# Altium PCB PCB1.PcbDoc
Units mil, origin at the board's own origin, x right, y up, seen from the top; angles counter-clockwise.
Board outline 6000 x 4000 mil, 2 copper layers (Top Layer, Bottom Layer); 104 components, 78 nets, 342 pads, 68 vias.
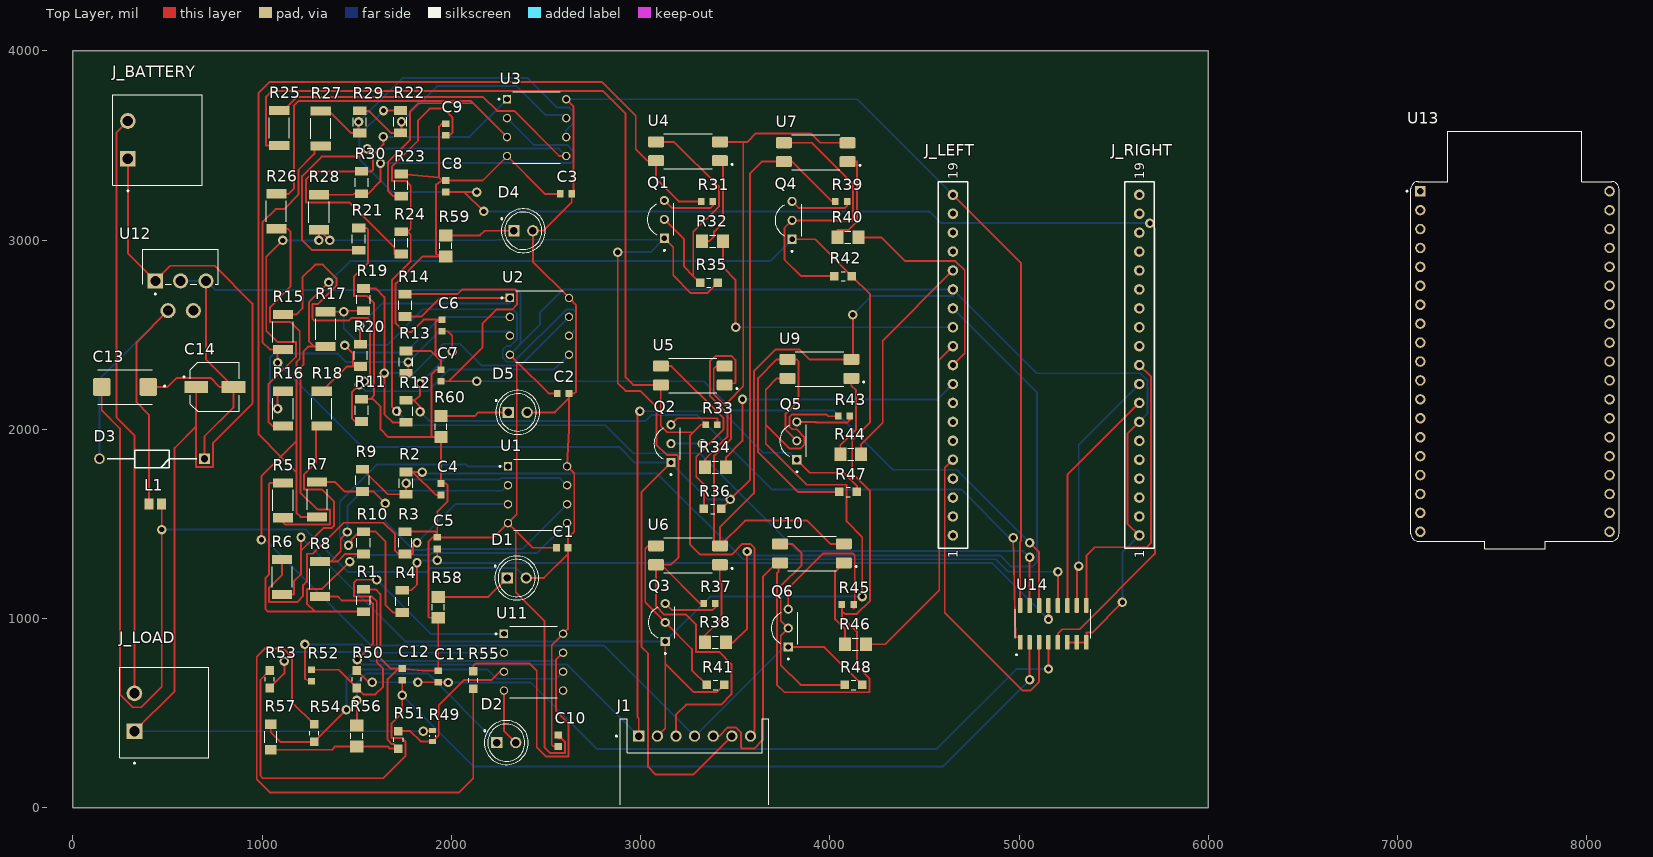
[diagram p0: Top Layer view]
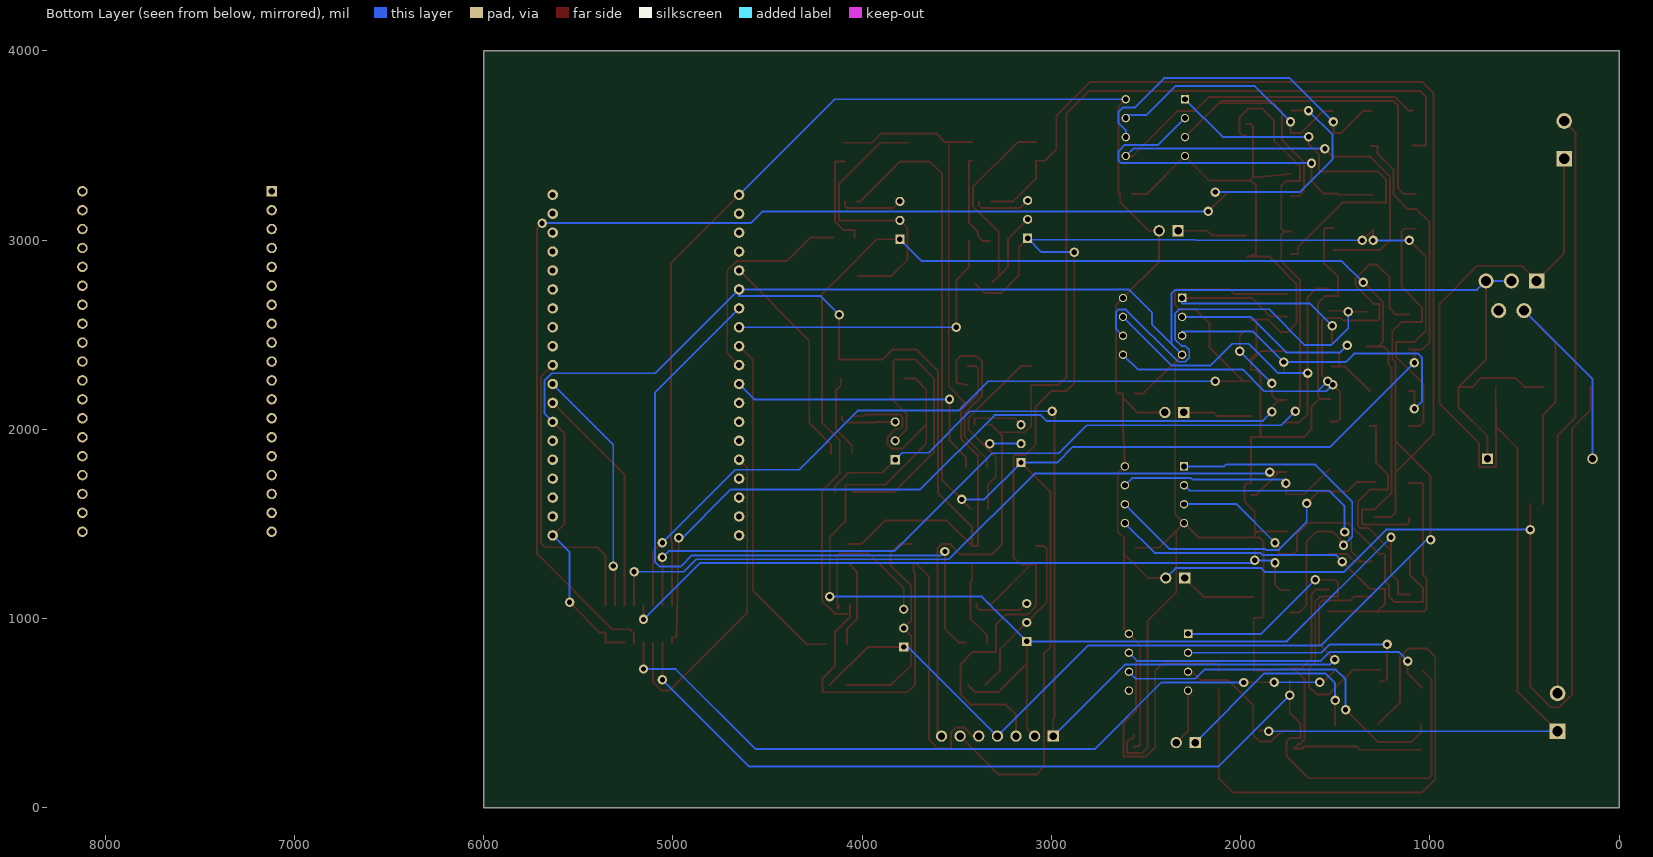
[diagram p1: Bottom Layer view, seen from below]
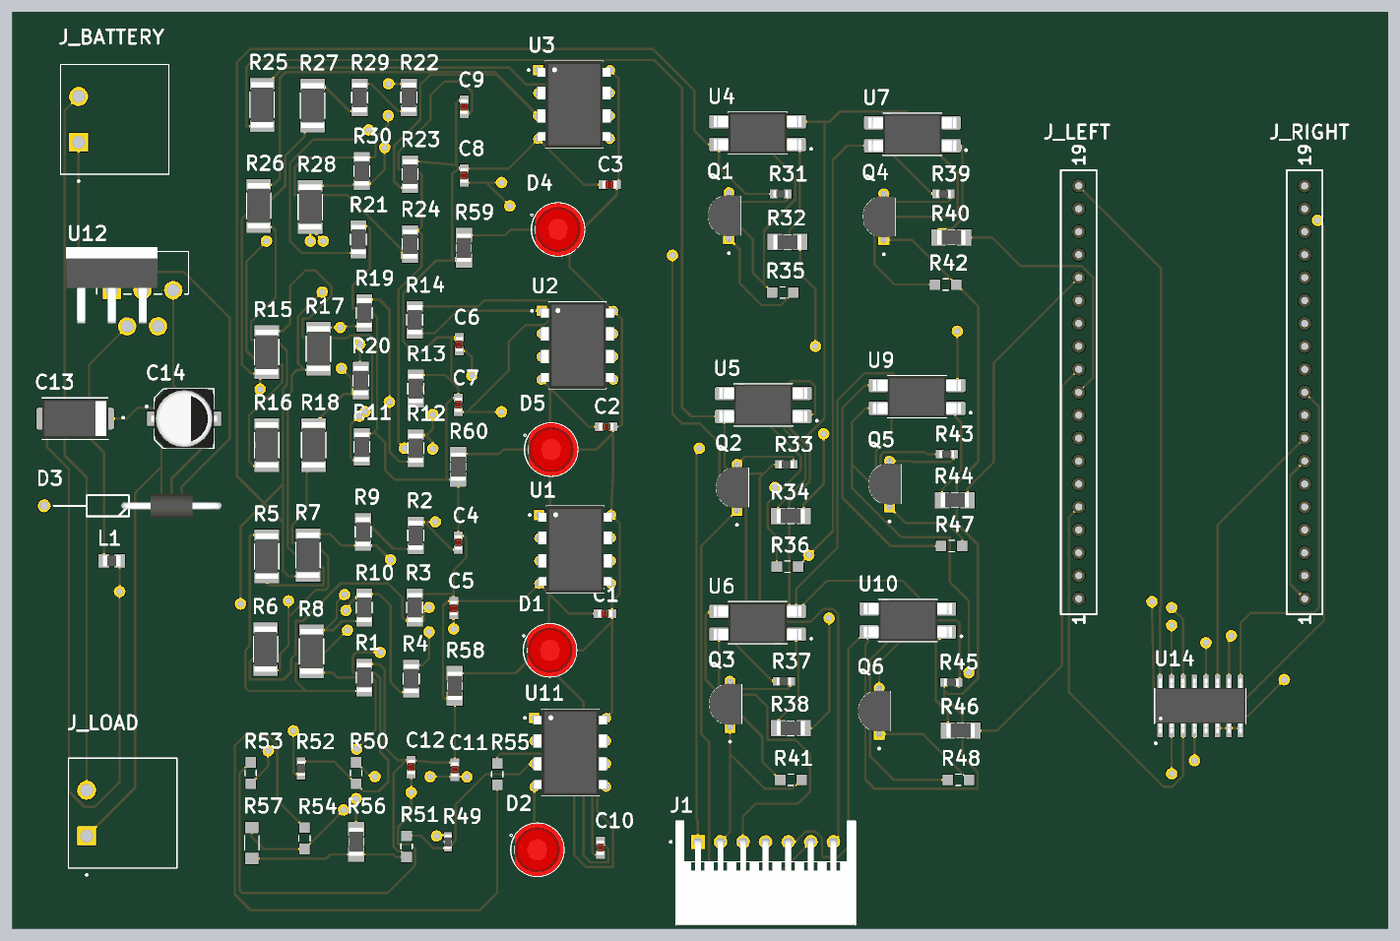
[diagram p2: 3D render of the assembled board from above, using the file's embedded part models]

## Layer stack, top to bottom
Top Solder: solder mask 0.4, Solder Resist, Dk 3.5
Top Layer: signal copper 1.4
Dielectric 1: dielectric 12.6, FR-4, Dk 4.8
Bottom Layer: signal copper 1.4
Bottom Solder: solder mask 0.4, Solder Resist, Dk 3.5

## Board outline
0,0 6000,0 6000,4000 0,4000

## Design rules (kind name [scope] priority, off if disabled: settings)
Clearance [All] p1: gap=10 ignorepadtopadclearanceinfootprint=FALSE
PolygonConnect [All] p1: connectstyle=Relief reliefconductorwidth=10 reliefentries=4 polygonreliefangle="90 Angle" airgapwidth=10
RoutingVias [All] p1: holewidth=28 width=50 viastyle="Through Hole" minholewidth=28 minwidth=50 maxholewidth=28 maxwidth=50
SolderMaskExpansion [All] p1: expansion=4 istentingtop=FALSE
SupplyNets "Schematic Supply Nets_1" [InNet('8')] p1: voltage=0.000
SupplyNets "Schematic Supply Nets" [InNet('4')] p2: voltage=0.000
Width [All] p1: maxlimit=10 minlimit=10 preferedwidth=10
30 further rules are at their usual default settings.

## Classes and differential pairs
component class "Passive Balancing": Q1 Q2 Q3 Q4 Q5 Q6 R31 R32 R33 R34 R35 R36 R37 R38 R39 R40 R41 R42 R43 R44 R45 R46 R47 R48 U4 U5 U6 U7 U9 U10
component class PackVoltageCurrentSensor: C10 C11 C12 D2 R49 R50 R51 R52 R53 R54 R55 R56 R57 U11
component class Controller: J_LEFT J_RIGHT U13 U14
component class CellsVoltMeasurementSensor: C1 C2 C3 C4 C5 C6 C7 C8 C9 C13 C14 D1 D3 D4 D5 J1 J_BATTERY J_LOAD L1 R1 R2 R3 R4 R5 R6 R7 R8 R9 R10 R11 R12 R13 R14 R15 R16 R17 R18 R19 R20 R21 R22 R23 R24 R25 R26 R27 R28 R29 R30 R58 R59 R60 U1 U2 U3 U12

## Components (designator, comment, footprint, x,y, rotation, side; value= is the part's Value field where it differs from the comment)
C1 "100nf" CAPC1608X90N 2585,1375 r0 top
C2 "100nf" CAPC1608X90N 2590,2190 r0 top
C3 "100nf" CAPC1608X90N 2605.51,3245 r0 top
C4 "100nf" CAPC1608X90N 1945,1684.49 r90 top
C5 "100nf" CAPC1608X90N 1925,1399.49 r90 top
C6 "100nf" CAPC1608X90N 1950,2549.49 r90 top
C7 "100nf" CAPC1608X90N 1945,2285 r90 top
C8 "100nf" CAPC1608X90N 1970,3285 r90 top
C9 "100nf" CAPC1608X90N 1970,3585 r90 top
C10 "100n" CAPC1608X90N 2565,354.49 r90 top
C11 "100n" CAPC1608X90N 1930,694.49 r90 top
C12 "100n" CAPC1608X90N 1740,705.51 r90 top
C13 "220µF" CAPPM7343X310N 275,2225 r180 top
C14 "100µF" CAP_EEEFN1E101UP 750,2225 r0 top
D1 "LED" LED_WP7113ID 2345,1215 r0 top
D2 "LED" LED_WP7113ID 2290,345 r0 top
D3 "1N5819-G" DIOAD1405W75L465D235 695,1845 r180 top
D4 "LED" LED_WP7113ID 2380,3050 r0 top
D5 "LED" LED_WP7113ID 2350,2090 r0 top
J1 "S7B-XH-A(LF)(SN)" JST_S7B-XH-A(LF)(SN) 3285,155 r0 top
J_BATTERY "1926015" PHOENIX_1926015 683.7,3290.63 r90 top
J_LEFT "SAMTEC-CES-119-01-X-S" SAMTEC-CES-119-01-X-S 4650,2340 r90 top
J_LOAD "1926015" PHOENIX_1926015 718.7,265.63 r90 top
J_RIGHT "SAMTEC-CES-119-01-X-S" SAMTEC-CES-119-01-X-S 5635,2340 r90 top
L1 "100µH" INDC2012X145N 435,1605 r0 top
Q1 "2N7000" TO92254P458H750-3 3125,3110 r90 top
Q2 "2N7000" TO92254P458H750-3 3160,1925 r90 top
Q3 "2N7000" TO92254P458H750-3 3130,980 r90 top
Q4 "2N7000" TO92254P458H750-3 3800,3105 r90 top
Q5 "2N7000" TO92254P458H750-3 3825,1940 r90 top
Q6 "2N7000" TO92254P458H750-3 3780,950 r90 top
R1 "1M" RESC3216X75N 1535,1096.18 r90 top
R2 "1M" RESC3216X75N 1760,1716.18 r90 top
R3 "1M" RESC3216X75N 1755,1401.18 r90 top
R4 "1M" RESC3216X75N 1740,1091.18 r90 top
R5 "1.3M" RESC5025X70N 1110,1625 r90 top
R6 "1.3M" RESC5025X70N 1105,1220 r90 top
R7 "1.3M" RESC5025X70N 1290,1630 r90 top
R8 "1.3M" RESC5025X70N 1305,1210 r90 top
R9 "1M" RESC3216X75N 1530,1731.18 r90 top
R10 "1M" RESC3216X75N 1535,1401.18 r90 top
R11 "1M" RESC3216X75N 1525,2101.18 r90 top
R12 "1M" RESC3216X75N 1760,2096.18 r90 top
R13 "1M" RESC3216X75N 1760,2356.18 r90 top
R14 "1M" RESC3216X75N 1755,2656.18 r90 top
R15 "1.3M" RESC5025X70N 1110,2515 r90 top
R16 "1.3M" RESC5025X70N 1110,2110 r90 top
R17 "1.3M" RESC5025X70N 1335,2530 r90 top
R18 "1.3M" RESC5025X70N 1315,2110 r90 top
R19 "1M" RESC3216X75N 1535,2686.18 r90 top
R20 "1M" RESC3216X75N 1520,2391.18 r90 top
R21 "1M" RESC3216X75N 1510,3006.18 r90 top
R22 "1M" RESC3216X75N 1730,3626.18 r90 top
R23 "1M" RESC3216X75N 1735,3291.18 r90 top
R24 "1M" RESC3216X75N 1735,2986.18 r90 top
R25 "1.3M" RESC5025X70N 1090,3592.87 r90 top
R26 "1.3M" RESC5025X70N 1075,3152.87 r90 top
R27 "1.3M" RESC5025X70N 1310,3590 r90 top
R28 "1.3M" RESC5025X70N 1300,3147.87 r90 top
R29 "1M" RESC3216X75N 1515,3625 r90 top
R30 "1M" RESC3216X75N 1525,3305 r90 top
R31 "1K" RESC1608X55N 3350.71,3205 r180 top
R32 "330" RESC3216X65 3380,2995 r180 top
R33 "1K" RESC1608X55N 3375,2025 r180 top
R34 "330" RESC3216X65 3395,1800 r180 top
R35 "4.7K" RES_ERJS06J472V 3360,2775 r180 top
R36 "4.7K" RES_ERJS06J472V 3380,1580 r180 top
R37 "1K" RESC1608X55N 3364.29,1080 r180 top
R38 "330" RESC3216X65 3395,875 r180 top
R39 "1K" RESC1608X55N 4060,3205 r180 top
R40 "330" RESC3216X65 4095,3015 r180 top
R41 "4.7K" RES_ERJS06J472V 3395,650 r180 top
R42 "4.7K" RES_ERJS06J472V 4070,2810 r180 top
R43 "1K" RESC1608X55N 4075,2070 r180 top
R44 "330" RESC3216X65 4110,1870 r180 top
R45 "1K" RESC1608X55N 4094.29,1075 r180 top
R46 "330" RESC3216X65 4135,865 r180 top
R47 "4.7K" RES_ERJS06J472V 4096.26,1670 r180 top
R48 "4.7K" RES_ERJS06J472V 4125,650 r180 top
R49 "13K" RES_ERJU03J133V 1900,380 r90 top
R50 "4.7K" RES_ERJS06J472V 1500,680 r90 top
R51 "1.6K" RES_ERA6ARB162V 1720,360 r90 top
R52 "1K" RESC1608X55N 1260,699.29 r90 top
R53 "4.7K" RES_ERJS06J472V 1040,680 r90 top
R54 "220K" RES_ERJS06J224V 1275,395 r90 top
R55 "220K" RES_ERJS06J224V 2115,675 r90 top
R56 "330" RESC3216X65 1500,380.12 r90 top
R57 "10K" RES_ERA8ARW103V 1045,375 r90 top
R58 "330" RESC3216X65 1930,1059.88 r90 top
R59 "330" RESC3216X65 1970,2969.88 r90 top
R60 "330" RESC3216X65 1945,2015 r90 top
U1 "LM358P" DIP794W45P254L959H508Q8 2455,1655 r0 top
U2 "LM358P" DIP794W45P254L959H508Q8 2465,2545 r0 top
U3 "LM358P" DIP794W45P254L959H508Q8 2450,3595 r0 top
U4 "PC817X2NIP1B" SOIC254P960X420-4N 3250,3470 r180 top
U5 "PC817X2NIP1B" SOIC254P960X420-4N 3275,2285 r180 top
U6 "PC817X2NIP1B" SOIC254P960X420-4N 3250,1335 r180 top
U7 "PC817X2NIP1B" SOIC254P960X420-4N 3925,3465 r180 top
U9 "PC817X2NIP1B" SOIC254P960X420-4N 3945,2320 r180 top
U10 "PC817X2NIP1B" SOIC254P960X420-4N 3905,1345 r180 top
U11 "LM358P" DIP794W45P254L959H508Q8 2433.7,770 r0 top
U12 "LM2596T-5.0" TO170P1016X470X2092-5 435,2785 r0 top
U13 "ESP32-DEVKITC-32E" MODULE_ESP32-DEVKITC-32E 7620,2360 r0 top
U14 "CD4051BM" SOIC127P600X175-16N 5180,972.56 r90 top

## Footprints (in the part's own frame and the unit in brackets; to place one, negate y for a bottom-side part, rotate by r counter-clockwise, add the part's x,y. Pads: shape width x height; smd on the part's side, far side on the other; paste and mask are expansions set on the pad)
CAP_EEEFN1E101UP [mm]
  rect 3.2x1.6 smd: 1(-2.5,0) 2(2.5,0)
  silkscreen extent -4.25,-3.3 3.3,3.3, body extent -3.65,-3.3 3.65,3.3, height 5.8
CAPC1608X90N [mm]
  rect 0.92x0.98 smd: 1(-0.775,0) 2(0.775,0)
  body extent -0.8,-0.41 0.8,0.41, height 0.9
CAPPM7343X310N [mm]
  rrect25% 2.37x2.43 smd: 1(-3.12,0) 2(3.12,0)
  silkscreen extent -5.41,-2.3 3.65,2.3, body extent -3.65,-2.15 3.65,2.15, height 3.1
DIOAD1405W75L465D235 [mm]
  rect 1.425x1.425 / inner round 1.425 / far side rect 1.425x1.425 hole 0.95 mask+0.102: 1(0,0)
  round 1.425 hole 0.95 mask+0.102: 2(14.1,0)
  silkscreen extent 1.06,-1.18 13.04,1.18, body extent -5.57,-1.35 5.57,1.35, height 2.7
DIP794W45P254L959H508Q8 [mm]
  rect 1.13x1.13 / inner round 1.13 / far side rect 1.13x1.13 hole 0.78 mask+0.102: 1(-3.97,3.81)
  round 1.13 hole 0.78 mask+0.102: 2(-3.97,1.27) 3(-3.97,-1.27) 4(-3.97,-3.81) 5(3.97,-3.81) 6(3.97,-1.27) 7(3.97,1.27) 8(3.97,3.81)
  silkscreen extent -5.13,-4.8 3.17,4.8, body extent -4.1,-4.79 4.1,4.79, height 5.08
INDC2012X145N [mm]
  rect 1.2x1.47 smd: 1(-0.86,0) 2(0.86,0)
  body extent -1,-0.63 1,0.63, height 1.45
JST_S7B-XH-A(LF)(SN) [mm]
  rect 1.508x1.508 / inner round 1.508 / far side rect 1.508x1.508 hole 1: 1(-7.5,5.7)
  round 1.508 hole 1: 2(-5,5.7) 3(-2.5,5.7) 4(0,5.7) 5(2.5,5.7) 6(5,5.7) 7(7.5,5.7)
  silkscreen extent -10.6,-3.5 9.95,8, body extent -9.95,-3.5 9.95,8, height 6.15
LED_WP7113ID [mm]
  round 1.508 hole 1: A(1.27,0)
  rect 1.508x1.508 / inner round 1.508 / far side rect 1.508x1.508 hole 1: C(-1.27,0)
  silkscreen extent -3.03,-2.95 2.95,2.95, body extent -2.5,-2.95 2.95,2.95, height 9.6
MODULE_ESP32-DEVKITC-32E [mm]
  rect 1.408x1.408 / inner round 1.408 / far side rect 1.408x1.408 hole 0.9: J2_1(-12.7,22.835)
  round 1.408 hole 0.9: J2_2(-12.7,20.295) J2_3(-12.7,17.755) J2_4(-12.7,15.215) J2_5(-12.7,12.675) J2_6(-12.7,10.135) J2_7(-12.7,7.595) J2_8(-12.7,5.055) J2_9(-12.7,2.515) J2_10(-12.7,-0.025) J2_11(-12.7,-2.565) J2_12(-12.7,-5.105) J2_13(-12.7,-7.645) J2_14(-12.7,-10.185) J2_15(-12.7,-12.725) J2_16(-12.7,-15.265) J2_17(-12.7,-17.805) J2_18(-12.7,-20.345) J2_19(-12.7,-22.885) J3_1(12.7,22.835) J3_2(12.7,20.295) J3_3(12.7,17.755) J3_4(12.7,15.215) J3_5(12.7,12.675) J3_6(12.7,10.135) J3_7(12.7,7.595) J3_8(12.7,5.055) J3_9(12.7,2.515) J3_10(12.7,-0.025) J3_11(12.7,-2.565) J3_12(12.7,-5.105) J3_13(12.7,-7.645) J3_14(12.7,-10.185) J3_15(12.7,-12.725) J3_16(12.7,-15.265) J3_17(12.7,-17.805) J3_18(12.7,-20.345) J3_19(12.7,-22.885)
  silkscreen extent -14.6,-25.13 13.97,30.87, body extent -13.97,-24.8 13.97,30.3, height 6.69
PHOENIX_1926015 [mm]
  rect 2.1x2.1 / inner round 2.1 / far side rect 2.1x2.1 hole 1.4: 1(3.54,10)
  round 2.1 hole 1.4: 2(8.62,10)
  silkscreen extent -0.85,0 12.16,12
RES_ERA6ARB162V [mm]
  rect 1.15x1.15 smd: 1(-1.175,0) 2(1.175,0)
  silkscreen extent -0.28,-0.62 0.28,0.62
RES_ERA8ARW103V [mm]
  rect 1.25x1.5 smd: 1(-1.725,0) 2(1.725,0)
  silkscreen extent -0.78,-0.8 0.78,0.8
RES_ERJS06J224V [mm]
  rect 1.15x1.15 smd: 1(-1.175,0) 2(1.175,0)
  silkscreen extent -0.28,-0.62 0.28,0.62
RES_ERJS06J472V [mm]
  rect 1.15x1.15 smd: 1(-1.175,0) 2(1.175,0)
  silkscreen extent -0.28,-0.62 0.28,0.62
RES_ERJU03J133V [mm]
  rect 0.65x0.9 smd paste+0 mask+0.102: 1(-0.725,0) 2(0.725,0)
  silkscreen extent -0.08,-0.4 0.08,0.4, body extent -0.8,-0.4 0.8,0.4, height 0.45
RESC1608X55N [mm]
  rect 0.87x0.93 smd: 1(-0.78,0) 2(0.78,0)
  body extent -0.8,-0.4 0.8,0.4, height 0.55
RESC3216X65 [mm]
  rect 1.6x1.8 smd: 1(-1.4,0) 2(1.4,0)
  silkscreen extent -0.4,-0.8 0.4,0.8, body extent -1.55,-0.8 1.55,0.8, height 0.65
RESC3216X75N [mm]
  rect 1.17x1.77 smd: 1(-1.494,0) 2(1.494,0)
  silkscreen extent -0.59,-0.88 0.59,0.88, body extent -1.6,-0.8 1.6,0.8, height 0.75
RESC5025X70N [mm]
  rect 1.24x2.72 smd paste+0 mask+0.102: 1(-2.34,0) 2(2.34,0)
  silkscreen extent -1.4,-1.35 1.4,1.35, body extent -2.5,-1.25 2.5,1.25, height 0.7
SAMTEC-CES-119-01-X-S [mm]
  round 1.41 hole 0.81 mask+0: 1(-22.86,0) 2(-20.32,0) 3(-17.78,0) 4(-15.24,0) 5(-12.7,0) 6(-10.16,0) 7(-7.62,0) 8(-5.08,0) 9(-2.54,0) 10(0,0) 11(2.54,0) 12(5.08,0) 13(7.62,0) 14(10.16,0) 15(12.7,0) 16(15.24,0) 17(17.78,0) 18(20.32,0) 19(22.86,0)
  silkscreen extent -24.58,-1.97 24.58,1.97
SOIC127P600X175-16N [mm]
  rrect25% 1.97x0.6 smd paste+0 mask+0.102: 1(-2.475,4.445) 2(-2.475,3.175) 3(-2.475,1.905) 4(-2.475,0.635) 5(-2.475,-0.635) 6(-2.475,-1.905) 7(-2.475,-3.175) 8(-2.475,-4.445) 9(2.475,-4.445) 10(2.475,-3.175) 11(2.475,-1.905) 12(2.475,-0.635) 13(2.475,0.635) 14(2.475,1.905) 15(2.475,3.175) 16(2.475,4.445)
  silkscreen extent -4.24,-5.07 1.95,5.07, body extent -3,-4.95 3,4.95, height 1.75
SOIC254P960X420-4N [mm]
  rrect25% 2.15x1.48 smd: 1(-4.28,1.27) 2(-4.28,-1.27) 3(4.28,-1.27) 4(4.28,1.27)
  silkscreen extent -6.03,-2.33 3.25,2.33, body extent -4.87,-2.29 4.87,2.29, height 4
TO170P1016X470X2092-5 [mm]
  rect 2.025x2.025 / inner round 2.025 / far side rect 2.025x2.025 hole 1.35: 1(0,0)
  round 2.025 hole 1.35: 2(1.7,-4) 3(3.4,0) 4(5.1,-4) 5(6.8,0)
  silkscreen extent -1.68,-1.85 8.48,4.28, body extent -5.08,-3.66 5.08,4.81, height 20.93
TO92254P458H750-3 [mm]
  rect 1.228x1.228 / inner round 1.228 / far side rect 1.228x1.228 hole 0.72 mask+0.102: 1(-2.54,0)
  round 1.228 hole 0.72 mask+0.102: 2(0,0) 3(2.54,0)
  silkscreen extent -4.25,-1.27 2.14,2.29, body extent -2.74,-1.27 2.74,2.33, height 8.09

## Part data
C1 C2 C3 C4 C5 C6 C7 C8 C9 C10 C11 C12: library part 06035C104K4T2A, "Capacitor MLCC 0603 100nF 50V", Package="1608 AVX", Check_prices=https://www.snapeda.com/parts/06035C104K4T2A/AVX/view-part/?ref=eda, MF=AVX, MP=06035C104K4T2A, SnapEDA_Link=https://www.snapeda.com/parts/06035C104K4T2A/AVX/view-part/?ref=snap
C13: library part 593D227X9010E2TE3, "Capacitor;Tantalum;220uF;Tol 10%;SMT;Vol-Rtg 10V;Size 7343-43", Package="2917 Vishay", Check_prices=https://www.snapeda.com/parts/593D227X9010E2TE3/Vishay/view-part/?ref=eda, MF="Vishay Sprague", MP=593D227X9010E2TE3, SnapEDA_Link=https://www.snapeda.com/parts/593D227X9010E2TE3/Vishay/view-part/?ref=snap
C14: library part EEEFN1E101UP, "CAP ALUM 100UF 20% 25V SMD", Package="RADIAL-2 Panasonic", Check_prices=https://www.snapeda.com/parts/EEEFN1E101UP/Panasonic/view-part/?ref=eda, MF=Panasonic, MP=EEEFN1E101UP, SnapEDA_Link=https://www.snapeda.com/parts/EEEFN1E101UP/Panasonic/view-part/?ref=snap
D1 D2 D4 D5: library part WP7113ID, "Red 617nm LED Indication - Discrete 2V Radial", Package="Radial Kingbright", Availability="In Stock", Check_prices=https://www.snapeda.com/parts/WP7113ID/Kingbright/view-part/?ref=eda, MF=Kingbright, MP=WP7113ID, Price=None, Purchase-URL=https://pricing.snapeda.com/search/part/WP7113ID/?ref=eda, SnapEDA_Link=https://www.snapeda.com/parts/WP7113ID/Kingbright/view-part/?ref=snap
D3: "Diode,Schottky Barrier,Vr 40V,If 1A,Pkg CASE 59-10,Vf 0.6V,Tj +125degc,Cs 25A", Package="DO-41 onsemi", Check_prices=https://www.snapeda.com/parts/1N5819G/Onsemi/view-part/?ref=eda, MF="ON Semiconductor", MP=1N5819G, SnapEDA_Link=https://www.snapeda.com/parts/1N5819G/Onsemi/view-part/?ref=snap
J1: "Connector Header Through Hole, Right Angle 7 position 0.098 (2.50mm)", Package=None, Check_prices=https://www.snapeda.com/parts/S7B-XH-A(LF)(SN)/JST/view-part/?ref=eda, MF="JST Sales", MP=S7B-XH-A(LF)(SN), SnapEDA_Link=https://www.snapeda.com/parts/S7B-XH-A(LF)(SN)/JST/view-part/?ref=snap
J_BATTERY J_LEFT J_LOAD J_RIGHT: Package=None, Availability=Unavailable, Price=None
  J_BATTERY J_LOAD: MP=1926015
  J_LEFT J_RIGHT: MP=SAMTEC-CES-119-01-X-S
L1: library part MLF2012C101MTD25, "100ÂµH Shielded Multilayer Inductor 2mA 3.1Ohm Max 0805 (2012 Metric)", Package="0805 TDK Corporation", Check_prices=https://www.snapeda.com/parts/MLF2012C101MTD25/TDK/view-part/?ref=eda, MF=TDK, MP=MLF2012C101MTD25, SnapEDA_Link=https://www.snapeda.com/parts/MLF2012C101MTD25/TDK/view-part/?ref=snap
Q1 Q2 Q3 Q4 Q5 Q6: "N-Channel 60 V 350mA (Tc) 1W (Tc) Through Hole TO-92-3", Package=Package, Check_prices=https://www.snapeda.com/parts/2N7000/STMicroelectronics/view-part/?ref=eda, MF=STMicroelectronics, MP=2N7000, SnapEDA_Link=https://www.snapeda.com/parts/2N7000/STMicroelectronics/view-part/?ref=snap
R1 R2 R3 R4 R9 R10 R11 R12 R13 R14 R19 R20 R21 R22 R23 R24 R29 R30: library part CR1206-FX-1004ELF, "Res 1206 1M 1% 250mW", Package="3216 Bourns", Check_prices=https://www.snapeda.com/parts/CR1206-FX-1004ELF/Bourns/view-part/?ref=eda, MF=Bourns, MP=CR1206-FX-1004ELF, SnapEDA_Link=https://www.snapeda.com/parts/CR1206-FX-1004ELF/Bourns/view-part/?ref=snap
R5 R6 R7 R8 R15 R16 R17 R18 R25 R26 R27 R28: library part ERJ-12ZYJ135U, "Res Thick Film 2010 1.3M Ohm 5% 3/4W -400ppm/Â°C to 150ppm/Â°C Molded SMD SMD Embossed Carrier T/R", Package="5025 Panasonic Electronic Components", Check_prices=https://www.snapeda.com/parts/ERJ-12ZYJ135U/Panasonic/view-part/?ref=eda, MF=Panasonic, MP=ERJ-12ZYJ135U, SnapEDA_Link=https://www.snapeda.com/parts/ERJ-12ZYJ135U/Panasonic/view-part/?ref=snap
R31 R33 R37 R39 R43 R45 R52: library part CR0603AFX-1001EAS, "DirenÃ§, AS 0603 1k %1 100mW TC100", Package="0603-2 Bourns", Check_prices=https://www.snapeda.com/parts/CR0603AFX-1001EAS/Bourns/view-part/?ref=eda, MF=Bourns, MP=CR0603AFX-1001EAS, SnapEDA_Link=https://www.snapeda.com/parts/CR0603AFX-1001EAS/Bourns/view-part/?ref=snap
R32 R34 R38 R40 R44 R46 R56 R58 R59 R60: library part RC1206JR-13330RL, "Res Thick Film 1206 330 Ohm 5% 0.25W(1/4W) Â±100ppm/Â°C Epoxy Pad SMD T/R", Package="1206-2 YAGEO", Check_prices=https://www.snapeda.com/parts/RC1206JR13330RL/Yageo/view-part/?ref=eda, MF="Yageo Corporation", MP=RC1206JR13330RL, SnapEDA_Link=https://www.snapeda.com/parts/RC1206JR13330RL/Yageo/view-part/?ref=snap
R35 R36 R41 R42 R47 R48 R50 R53: library part ERJS06J472V, Package=None, Availability=Unavailable, MP=ERJS06J472V, Price=None
R49: library part ERJU03J133V, "RES 13K OHM 5% 1/10W 0603 SMD", Package="1608-2 Panasonic", Check_prices=https://www.snapeda.com/parts/ERJ-U03J133V/Panasonic/view-part/?ref=eda, MF=Panasonic, MP=ERJ-U03J133V, SnapEDA_Link=https://www.snapeda.com/parts/ERJ-U03J133V/Panasonic/view-part/?ref=snap
R51: library part ERA6ARB162V, Package=None, Availability=Unavailable, MP=ERA6ARB162V, Price=None
R54 R55: library part ERJS06J224V, Package=None, Availability=Unavailable, MP=ERJS06J224V, Price=None
R57: library part ERA8ARW103V, Package=None, Availability=Unavailable, MP=ERA8ARW103V, Price=None
U1 U2 U3 U11: "Dual, 30-V, 700-kHz operational amplifier", Package="PDIP-8 Texas", Check_prices=https://www.snapeda.com/parts/LM358P/Texas+Instruments/view-part/?ref=eda, MF="Texas Instruments", MP=LM358P, SnapEDA_Link=https://www.snapeda.com/parts/LM358P/Texas+Instruments/view-part/?ref=snap
U4 U5 U6 U7 U9 U10: "Optocoupler DC-IN 1-CH Transistor DC-OUT 4-Pin DIP SMD T/R", Package="SMD-4 Sharp Microelectronics", Check_prices=https://www.snapeda.com/parts/PC817X2NIP1B/Sharp+Microelectronics/view-part/?ref=eda, MF="Sharp Microelectronics", MP=PC817X2NIP1B, SnapEDA_Link=https://www.snapeda.com/parts/PC817X2NIP1B/Sharp+Microelectronics/view-part/?ref=snap
U12: "SIMPLE SWITCHERÂ® 4.5V to 40V, 3A Low Component Count Step-Down Regulator 5-TO-220", Package="TO-220-5 Texas Instruments", Check_prices=https://www.snapeda.com/parts/LM2596T-5.0/Texas+Instruments/view-part/?ref=eda, MF="Texas Instruments", MP=LM2596T-5.0, SnapEDA_Link=https://www.snapeda.com/parts/LM2596T-5.0/Texas+Instruments/view-part/?ref=snap
U13: "The ESP32-DEVKITC-32E transceiver evaluation board from Espressif Systems is a powerful development tool for wireless communication technologies. It supports 802.11 b/g/n Wi-Fi and BluetoothÂ® Smart Ready 4.x (BLE) dual-mode at 2.4GHz, making it ideal for", Package=None, Check_prices=https://www.snapeda.com/parts/ESP32-DEVKITC-32E/Espressif+Systems/view-part/?ref=eda, MF="Espressif Systems", MP=ESP32-DEVKITC-32E, SnapEDA_Link=https://www.snapeda.com/parts/ESP32-DEVKITC-32E/Espressif+Systems/view-part/?ref=snap
U14: "20-V, 8:1, 1-channel analog multiplexer with logic-level conversion", Package="SOIC-16 Texas Instruments", Check_prices=https://www.snapeda.com/parts/CD4051BM/Texas+Instruments/view-part/?ref=eda, MF="Texas Instruments", MP=CD4051BM, SnapEDA_Link=https://www.snapeda.com/parts/CD4051BM/Texas+Instruments/view-part/?ref=snap

## Via types
v1: diameter 50, hole 28, Top Layer to Bottom Layer, 68 vias

## Nets (pads, with @x,y where several pads share a name; then routed paths per layer and width w, separated by ;. In a path a pad name is that pad's centre, name@x,y a point inside that pad or via, vN(x,y) a via of type N, cw(c..) or ccw(c..) an arc to the next point about the centre after c; other vN are vias at no path point)
4: C1.1 C2.1 C3.1 C4.2 C5.2 C6.2 C7.2 C8.2 C9.2 C10.2 C11.2 C12.2 C13.1 C14.2 D3.1 J_LEFT.14 J_RIGHT.1 J_RIGHT.7 R1.2 R3.2 R11.2 R13.2 R21.2 R23.2 R51.1 R56.1 R57.1 R58.1 R59.1 R60.1 U1.4 U2.4 U3.4 U4.2 U5.2 U6.2 U7.2 U9.2 U10.2 U12.3 U12.5 U14.6 U14.7 U14.8 | length 27533.9
  Top Layer w10: C13.1 501,2225 548,2272 727,2272 774,2225 C14.2@848,2225 ; D3.1 695,1963.77 848.42,2117.2 C14.2 C14.2@848,2225 ; U12.5 702.72,2370.28 C14.2@848,2225 ; R57.1 1369.09,307.09 1387,325 R56.1 1662.36,325 1673.62,313.74 R51.1 1696.09,337.65 1684.71,337.65 1662.36,360 1662.36,680.36 1718.02,736.02 ; R21.2 1550,3065 1560,3055 1560,2882 1485,2807 1485,2706 1553,2706 1591,2668 1591,2180 1571,2160 ; R11.2 1571,2160 ; R1.2 1600,1155 1625,1130 1625,791.02 1680,736.02 1718.02,736.02 ; R23.2 1935,3331.18 ; R3.2 1915,1460 1925,1450 ; R13.2 1890,2415 1945,2360 ; C9.2 1950,3615.51 1935,3600.51 1935,3331.18 ; U2.4 2345,2358.7 ; C1.1 2428.7,1375 2340,1463.7 ; C2.1 2513.7,2190 2345,2358.7 ; C10.2 2565,366 2583.29,366 2599.29,350 2599.29,290.86 2520,290.86 2491,319.86 2491,989 2340,1140 2340,1463.7 ; C3.1 2493.7,3245 U3.4 2164.21,3315.51 C8.2 1950.67,3315.51 ; U4.2 3542,3520 ; U5.2 3400,2335 3386,2321 3386,2187 3477.84,2095.16 ; U10.2 4003,1395 3880,1518 3551.5,1518 U6.2 ; U7.2 3949,3515 3900,3564 3609,3564 3565,3520 3542,3520 ; v1(4121,2606) 4121,2370 U9.2 3891,2370 3838,2423 3714,2423 3598,2307 3598,1662 3418.5,1482.5 U6.2 ; U14.6 U14.7 U14.8 5355,926.71 5385.71,926.71 v1(5546,1087) ; J_RIGHT.1 5572.24,1502.76 5572.24,1977.24 J_RIGHT.7 ; 1571,2160 1586,2160 1626,2120 1626,2000 1666.12,1959.88 1904.12,1959.88 ; 1718.02,736.02 C12.2 1846.02,725 C11.2 R58.1 1883,1004.76 1879,1008.76 1879,1409 1900,1430 C5.2 ; 1904.12,1959.88 R60.1 C4.2 1970,1715 1980,1705 1980,1621 1925,1566 1925,1450 ; 1904.12,1959.88 1894,1970 1894,2289.51 1920,2315.51 C7.2 1945,2360 ; C5.2 2223.7,1430 U1.4 ; C5.2 1925,1450 ; 1935,3331.18 1950.67,3315.51 ; 1945,2360 1945,2376 1915,2406 1915,2570 C6.2 1853,2580 1787,2514 1751,2514 1705,2560 1705,2771 1848.76,2914.76 R59.1 1919,2925.76 1919,3294.51 1950.67,3315.51 ; U1.4 2340,1463.7 ; U1.4 2345,1551.3 2345,2358.7 ; U6.2 3388,1385 3388,1861.98 3477.84,1951.81 3477.84,2095.16 ; 3477.84,2095.16 3477.84,2120 3456.42,2141.42 3542,2227 3542,3520
  Bottom Layer w10: U12.3 U12.5 750.72,2737 2346,2737 2365.95,2717.05 2365.95,2452.25 ; U2.4 2365.95,2452.25 ; v1(4121,2606) 4221,2706 4650,2706 J_LEFT.14 ; v1(5546,1087) 5546,1351 J_RIGHT.1 ; J_RIGHT.7 5678,2083 5678,2260 5641,2297 5093,2297 J_LEFT.14 ; 2365.95,2452.25 2468.69,2554.99 2468.69,2618.69 2590,2740 J_LEFT.14
8: C1.2 C2.2 C3.2 C10.1 C13.2 D1.A D4.A D5.A J_LEFT.19 L1.2 U1.8 U2.8 U3.8 U11.8 U14.16 | length 13854
  Top Layer w10: C13.2 152.17,2100.83 248,2005 248,600 316,532 360,532 468.86,640.86 v1(468.86,1471) L1.2 ; D1.A 2489,1215 2615.51,1341.51 ; D5.A 2546.49,2090 2620.51,2164.02 ; C10.1 2540,323.98 2530,333.98 2530,860 U11.8 2615.51,945.51 2615.51,1341.51 ; U3.8 2644,3707.3 2644,3245 C3.2 2636.02,3200 2486.02,3050 D4.A 2430,2886.3 U2.8 2659,2657.3 2659,2200 2649,2190 C2.2 2620.51,2164.02 ; J_LEFT.19 5009,2881 5009,1409 5005,1405 U14.16 ; 2615.51,1341.51 C1.2 2615.51,1427 2649,1460.49 2649,1767.3 U1.8 2620.51,2001.21 2620.51,2164.02
  Bottom Layer w10: v1(468.86,1471) 1230.41,1471 1454.94,1246.47 1869.47,1246.47 1890,1267 2343,1267 D1.A ; U3.8 4145,3745 J_LEFT.19
ADC_C1: C5.1 R4.2 U14.13 | length 3812
  Top Layer w10: R4.2 1788,1150 1818,1180 v1(1818,1295) ; v1(1925,1308) C5.1 ; v1(5155,996) U14.13
  Bottom Layer w10: v1(1818,1295) 1831,1308 v1(1925,1308) 1939,1294 4857,1294 v1(5155,996)
ADC_C2: C7.1 R14.2 U14.14 | length 5094
  Top Layer w10: R14.2 2032,2715 2057,2740 2336,2740 2346,2730 2346,2659 2320,2633 2238,2633 2165,2560 2165,2435 1984.49,2254.49 ; C7.1 1984.49,2254.49 ; v1(2133.51,2254.49) 1984.49,2254.49 ; v1(5055,1401) 5105,1351 U14.14
  Bottom Layer w10: v1(2133.51,2254.49) 3333.51,2254.49 3487,2101 4019,2101 4333,1787 4669,1787 v1(5055,1401)
AdC_C3: C9.1 R24.2 U14.15 | length 6046.3
  Top Layer w10: v1(1710,2096) 1685,2121 1685,2789 1785,2889 1785,3030 1770,3045 ; R24.2 1770,3045 ; C9.1 1970,3554 1990,3554 2005,3569 2005,3650 1960,3695 1885,3695 1824,3634 1824,3526.88 1685.16,3388.03 1685.16,3311.97 1760,3311.97 1785,3286.97 1785,3060 1770,3045 ; U14.15 v1(5055,1324)
  Bottom Layer w10: v1(1710,2096) 1784,2022 2812,2022 2960,1874 3312.95,1874 3829.95,1357 5022,1357 v1(5055,1324)
ADC_C4: C4.1 R2.2 U14.12 | length 4040.4
  Top Layer w10: R2.2 1796,1775 ; v1(1846,1775) 1796,1775 ; C4.1 1917.02,1653.98 1796,1775 ; U14.12 v1(5205,1248)
  Bottom Layer w10: v1(1846,1775) 1854,1767 3088,1767 3541,1314 4876,1314 4942,1248 v1(5205,1248)
ADC_C5: C6.1 R12.2 U14.1 | length 4693.7
  Top Layer w10: v1(1834,2093) 1834,2121 1804.5,2150.5 ; v1(1834,2242.98) 1834,2180 1804.5,2150.5 ; C6.1 1980,2518.98 2004,2494.98 v1(2004,2412.98) ; v1(4969,1427) 4980,902 5005,902 U14.1 ; 1804.5,2150.5 R12.2 1800,2155 1804.5,2150.5
  Bottom Layer w10: v1(1834,2093) 1882,2045 3025.55,2045 3056.55,2076 3300,2076 3693,1683 4693,1683 4969,1407 v1(4969,1427) ; v1(1834,2242.98) v1(2004,2412.98)
ADC_C6: C8.1 R22.2 U14.5 | length 7437.4
  Top Layer w10: v1(1641,3685) R22.2 ; C8.1 2067.51,3254.49 ; v1(2134,3254.49) 2067.51,3254.49 ; v1(2170,3152) 2067.51,3254.49 ; U14.5 5205,920 5229,944 5319,944 5717.76,1342.76 5717.76,3063.24 v1(5691,3090)
  Bottom Layer w10: v1(1641,3685) 1514,3558 1514,3427.65 1687.16,3254.49 v1(2134,3254.49) ; v1(2170,3152) 4526,3152 4588,3090 v1(5691,3090)
ADC_ip: C12.1 R53.2 U14.2 | length 5745.6
  Top Layer w10: R53.2 991,677.26 991,170 1004,157 1639,157 1758,276 1758,350.62 1740,368.62 1682.36,368.62 1682.36,444 1740,501.64 v1(1740,595) C12.1 ; v1(5055,677) U14.2
  Bottom Layer w10: v1(1740,595) 2117,218 4596,218 v1(5055,677)
ADC_vb: C11.1 R50.2 U14.4 | length 4143.3
  Top Layer w10: R50.2 1562.28,663.98 v1(1582.28,663.98) ; v1(1823.02,663.98) C11.1 1981.98,663.98 v1(1983.2,662.75) ; v1(5155,734) U14.4
  Bottom Layer w10: v1(1582.28,663.98) v1(1823.02,663.98) ; v1(1983.2,662.75) 2419.25,662.75 2771,311 4563,311 4986,734 v1(5155,734)
B0: J1.1 Q5.1 R8.1 R47.1 | length 5346.9
  Top Layer w10: R8.1 1398.13,1117.87 1419.03,1096.97 1568.03,1096.97 1585,1080 1585,867 v1(1502,784) ; J1.1 2989.72,474.28 2984,480 2984,2084 v1(2996,2096) ; Q5.1 3894,1771 4073.23,1771 4142.52,1701.71 R47.1
  Bottom Layer w10: v1(1502,784) 1528.75,757.25 2611.89,757.25 J1.1 ; v1(2996,2096) 3430.1,2096 3648.97,1877.13 3787.87,1877.13 Q5.1
B1: J1.2 Q3.1 R6.1 R18.1 R41.1 R43.2 U9.4 | length 7805.2
  Top Layer w10: R6.1 1167.17,1127.87 1167.17,1197.28 1205,1235.12 1205,1360 ; v1(1205,1430) 1205,1360 ; R18.1 1284,2017.87 1284,1824.54 1221.46,1762 1221.46,1682 1317,1682 1378.54,1620.46 1378.54,1490 1367.01,1478.46 1323.46,1478.46 1205,1360 ; J1.2 3130,421.26 3130,762 ; Q3.1 3130,762 ; R41.1 3403.26,612 3280,612 3130,762 ; U9.4 3720,2270 3661,2211 3661,2025 ; R43.2 3990,2070 3980,2080 3802,2080 3785.83,2063.83 3785.83,2015 3800,2000.83 3824.17,2000.83 3865,1960 3865,1920 3845,1900 3786,1900 3661,2025 ; v1(4171,1117) 4171,1431 4088,1514 4088,1708 3877,1708 3661,1924 3661,2025
  Bottom Layer w10: v1(1205,1430) 1755,880 Q3.1 3367,1117 v1(4171,1117)
B2: J1.3 Q1.1 R16.1 R28.1 R35.1 R37.2 U6.4 | length 7848.7
  Top Layer w10: v1(1109,2999) 1021.46,2911.46 1021.46,2520.83 1080,2462.28 1178.54,2462.28 1178.54,2383.46 1033,2237.92 1033,2040 1055.13,2017.87 R16.1 ; v1(1300,2999) R28.1 v1(1356.75,2999) ; v1(2879,2937) 2879,2245 2920,2204 2999,2204 3083,2120 3083,1920 3138,1865 3190,1865 3200,1855 3200,1325 3160,1285 U6.4@3110,1285 ; Q1.1 3172,2963 3172,2813.78 3265.78,2720 3351.26,2720 R35.1 ; J1.3 3186,379.41 3186,492 3240,546 3425,546 3479,600 3479,760 3414.43,824.57 3293,824.57 3293,969 3240,1022 3124,1022 3081,1065 3081,1285 U6.4 U6.4@3110,1285 ; R37.2 3315,1080 U6.4@3110,1285
  Bottom Layer w10: v1(1109,2999) v1(1300,2999) ; v1(1356.75,2999) Q1.1@3119.5,3004.5 ; v1(2879,2937) 3052,2937 Q1.1@3119.5,3004.5 ; Q1.1 Q1.1@3119.5,3004.5
B3: J1.4 Q6.1 R7.1 R26.1 R31.2 R48.1 U4.4 | length 11218.1
  Top Layer w10: v1(996,1417) 996,1753 1099,1856 ; R26.1 1134.25,3060.75 1149,3046 1149,2754.08 1041.46,2646.54 1041.46,2567.72 1150.83,2567.72 1198.54,2520 1198.54,2372.54 1181,2355 1181,1938 ; R7.1 1203.13,1537.87 1181,1560 1181,1774 ; U4.4 U4.4@3081,3420 ; R31.2 3200,3205 3081,3324 U4.4@3081,3420 ; Q6.1 3971.26,850 R48.1 ; 1099,1856 981,1974 981,3778 1040,3837 2794,3837 2974,3657 2974,3480 3034,3420 U4.4@3081,3420 ; 1099,1856 1181,1938 ; 1099,1856 1181,1774 ; 1181,1774 1181,1938
  Bottom Layer w10: v1(996,1417) 1016,1417 1575,858 2806.41,858 J1.4 3755.59,850 Q6.1
B4: J1.5 Q4.1 R5.1 R17.1 R42.1 R45.2 U10.4 | length 9832.7
  Top Layer w10: R5.1 1110,1508.46 1120,1498.46 1358.54,1498.46 1358.54,1577.28 1290.74,1577.28 1201.46,1666.57 1201.46,2326.38 1218.54,2343.46 1218.54,2413.42 1243,2437.87 1275.13,2437.87 ; R17.1 1275.13,2437.87 ; v1(1352,2777) 1246.46,2671.46 1246.46,2466.54 1275.13,2437.87 ; J1.5 3414.41,379.41 3460,425 3502,425 3531,396 3531,320 3538,313 3600,313 3646,359 3646,1221 3720,1295 U10.4@3729,1295 ; U10.4 U10.4@3729,1295 ; Q4.1 3921.26,3005 R42.1 4212,2714.26 4212,2038 4118,1944 4118,1768 4211,1675 4211,1093 4143,1025 4078.58,1025 4063.58,1040 ; R45.2 4063.58,1040 ; U10.4@3729,1295 3729,1249 3720,1240 3720,651 3760,611 4209,611 4209,684 4143,750 4143,932 4063.58,1011.42 4063.58,1040
  Bottom Layer w10: v1(1352,2777) 1465,2890 3685,2890 Q4.1
B5: J1.6 Q2.1 R15.1 R27.1 R36.1 R39.2 U7.4 | length 8727.4
  Top Layer w10: v1(1081,2353) R15.1@1081,2422.87 ; R15.1 R15.1@1081,2422.87 ; R27.1 1276,3497.87 1276,3456 1191,3371 1191,3240 1115.5,3164.5 1070.5,3164.5 1001.46,3095.46 1001.46,2461.42 1040,2422.87 R15.1@1081,2422.87 ; Q2.1 3004,1669 3004,851 3039,816 3039,217 3080,176 3278.44,176 J1.6 ; R36.1 3473,1626.74 v1(3473,1630) 3578,1735 3578,3353 3640,3415 U7.4 3800,3415 4010,3205 R39.2
  Bottom Layer w10: v1(1081,2353) 1526,1908 2886,1908 2969,1825 Q2.1 3355,1630 v1(3473,1630)
B6: J1.7 R25.1 R33.2 U5.4 | length 6369.2
  Top Layer w10: R25.1 1021,3500.75 1021,3759 1051,3789 2800,3789 2920,3669 2920,2275 2960,2235 U5.4@3106,2235 ; U5.4 U5.4@3106,2235 ; R33.2 3318,2025 3278,1985 ; J1.7 3602,401.13 3602,1373 3580,1395 3536.67,1395 3480.67,1339 3314,1339 3259.88,1393.12 3259.88,1966.88 3278,1985 ; U5.4@3106,2235 3106,2019 3140,1985 3278,1985
Bal_cmd_1: J_LEFT.9 R34.1 | length 1541
  Top Layer w10: R34.1 3450.12,1851.12 3538,1939 v1(3538,2159)
  Bottom Layer w10: v1(3538,2159) 4569,2159 J_LEFT.9
Bal_cmd_2: J_LEFT.10 R40.1 | length 1161.3
  Top Layer w10: R40.1 4272,3015 4397,2890 4663,2890 4712.76,2840.24 4712.76,2402.76 J_LEFT.10
Bal_cmd_3: J_LEFT.11 R46.1 | length 1825.8
  Top Layer w10: R46.1 4293,865 4578,1150 4578,2368 J_LEFT.11
Bal_cmd_4: J_LEFT.12 R32.1 | length 1630.7
  Top Layer w10: R32.1 3435.12,2855.88 3502,2789 v1(3502,2540)
  Bottom Layer w10: v1(3502,2540) J_LEFT.12
Bal_cmd_5: J_LEFT.13 R38.1 | length 3650.5
  Top Layer w10: R38.1 3490,875 3562,947 v1(3562,1355)
  Bottom Layer w10: v1(3562,1355) 3583,1334 4899,1334 4958,1275 5070,1275 5095,1300 5095,2195 J_LEFT.13
Bal_cmd_6: J_LEFT.15 R44.1 | length 1170.8
  Top Layer w10: R44.1 4165.12,1921.51 4279,2035.39 4279,2469 J_LEFT.15
IN-V_Batt: C14.1 J_BATTERY.1 J_LOAD.1 R49.2 U12.1 | length 6119.8
  Top Layer w10: J_BATTERY.1 290,2930 U12.1 515,2865 748,2865 948,2665 948,2136 739,1927 739,1801 651,1801 651,2017 ; J_LOAD.1 537,617 537,1902 651,2017 ; C14.1 651,2017 ; v1(1851,405) 1854.54,408.54 R49.2
  Bottom Layer w10: J_LOAD.1 v1(1851,405)
MUX_OUT: J_LEFT.5 U14.3 | length 1722.6
  Top Layer w10: J_LEFT.5 4607,1797 4607,1032 5019,620 5059,620 5105,666 U14.3
MUX_S0: J_RIGHT.8 U14.11 | length 1227.4
  Top Layer w10: U14.11 5255,1760 J_RIGHT.8
MUX_S1: J_RIGHT.9 U14.10 | length 1306.7
  Top Layer w10: U14.10 5305,1268 v1(5315,1278)
  Bottom Layer w10: v1(5315,1278) 5315,1920 J_RIGHT.9
MUX_S2: J_RIGHT.10 U14.9 | length 1599.1
  Top Layer w10: U14.9 5355,1332.24 5400,1377.24 5675,1377.24 5697.76,1400 5697.76,2277.24 J_RIGHT.10
NetD1_C: D1.C R58.2 | length 406.4
  Top Layer w10: R58.2 2195,1115 D1.C
NetD2_A: D2.A U11.4 | length 300.9
  Top Layer w10: U11.4 2277.4,407.6 D2.A
NetD2_C: D2.C R56.2 | length 1136.3
  Top Layer w10: R56.2 v1(1500,568)
  Bottom Layer w10: v1(1500,568) 1500,658 1553,711 1874,711 D2.C
NetD3_2: D3.2 L1.1 U12.2 | length 2050.7
  Top Layer w10: L1.1 401.14,2077.86 336,2143 336,2461.59 U12.2
  Bottom Layer w10: D3.2 139.88,2265.47 U12.2
NetD4_C: D4.C R59.2 | length 370.4
  Top Layer w10: R59.2 2150,3025 2175,3050 D4.C
NetD5_C: D5.C R60.2 | length 363.2
  Top Layer w10: R60.2 2123,2070.12 2142.88,2090 D5.C
NetQ1_2: Q1.2 R35.2 U4.3 | length 1371.9
  Top Layer w10: U4.3 3176,3520 3414,3282 3414,3180 3278,3044 3278,2810.74 ; Q1.2 3229,3006 3229,2859.74 3278,2810.74 ; R35.2 3278,2810.74
NetQ1_3: Q1.3 R31.1 | length 299.9
  Top Layer w10: Q1.3 3164,3171 3370,3171 3381.42,3182.42 R31.1
NetQ2_2: Q2.2 R36.2 U5.3 | length 1204
  Top Layer w10: U5.3 3161.84,2335 3437.84,2059 3437.84,2000 3362.84,1925 ; v1(3326,1925) 3362.84,1925 ; R36.2 3333.74,1709.21 3293.38,1749.57 3293.38,1855.55 3362.84,1925
  Bottom Layer w10: Q2.2 v1(3326,1925)
NetQ2_3: Q2.3 R33.1 | length 293.8
  Top Layer w10: Q2.3 3194,2059 3405.71,2059 R33.1
NetQ3_2: Q3.2 R41.2 U6.3 | length 918.2
  Top Layer w10: U6.3 3039,1385 3024,1370 3024,1086 Q3.2 3270.21,839.79 3270.21,728.53 R41.2
NetQ3_3: Q3.3 R37.1 | length 304.9
  Top Layer w10: Q3.3 3164,1046 3381,1046 3395,1060 R37.1
NetQ4_2: Q4.2 R42.2 U7.3 | length 1493.2
  Top Layer w10: U7.3 3903,3515 4123,3295 4123,3107 4121,3105 Q4.2 3760,3065 3760,2898 3848,2810 R42.2
NetQ4_3: Q4.3 R39.1 | length 332.5
  Top Layer w10: Q4.3 3834,3171 4080,3171 4090.71,3181.71 R39.1
NetQ5_2: Q5.2 R47.2 U9.3 | length 1639.2
  Top Layer w10: Q5.2 3765.83,1999.17 3765.83,2083.83 3834,2152 3834,2360 3824,2370 U9.3 3719,2370 3620.78,2271.78 3620.78,1879.22 3830,1670 R47.2
NetQ5_3: Q5.3 R43.1 | length 308.2
  Top Layer w10: Q5.3 3924,2040 3928,2036 4091.71,2036 4105.71,2050 R43.1
NetQ6_2: Q6.2 R48.2 U10.3 | length 1185.1
  Top Layer w10: U10.3 3800,1395 3850,1345 3850,1283 3740,1173 3740,990 Q6.2 3740,910 3740,755 3845,650 R48.2
NetQ6_3: Q6.3 R45.1 | length 848.3
  Top Layer w10: Q6.3 3780,1161 3964,1345 4120,1345 4131,1334 4131,1059 4125,1053 R45.1
NetR1_1: R1.1 R5.2 U1.5 | length 2925.7
  Top Layer w10: R5.2 1041,1717.13 1036,1712.13 1036,1234.24 1016.46,1214.69 1016.46,1051.34 1030.43,1037.36 1279.09,1037.36 ; v1(1462,1302) 1317.28,1157.28 1236.46,1157.28 1236.46,1080 1279.09,1037.36 ; R1.1 1279.09,1037.36
  Bottom Layer w10: v1(1462,1302) 1497,1337 1885,1337 1896,1348 2454.3,1348 U1.5
NetR2_1: R2.1 R9.2 U1.7 | length 1221.8
  Top Layer w10: R9.2 1662.64,1657.36 R2.1 v1(1760,1716)
  Bottom Layer w10: v1(1760,1716) 1779,1735 2253,1735 2261,1743 2573.3,1743 U1.7
NetR3_1: R3.1 R6.2 U1.3 | length 2056.3
  Top Layer w10: R6.2 1105,1232.28 1036.46,1163.74 1036.46,1088 1184.46,1088 1216.46,1120 1216.46,1177.28 1236,1196.83 1236,1343 1267.44,1343 1431.44,1507 1640,1507 1702,1445 1702,1360 1719.64,1342.36 R3.1 1796,1342.36 1796,1380 v1(1818,1402)
  Bottom Layer w10: v1(1818,1402) 2021,1605 U1.3
NetR4_1: R4.1 R10.2 U1.1 | length 1918.9
  Top Layer w10: v1(1456,1388) 1471,1403 1471,1418 1513,1460 R10.2 1600,1460 1650.67,1409.33 1650.67,1074.33 1692.64,1032.36 R4.1
  Bottom Layer w10: v1(1456,1388) 1410,1434 1410,1617 1608,1815 2076,1815 2086,1805 U1.1
NetR7_2: R7.2 R9.1 U1.6 | length 1628
  Top Layer w10: R7.2 1385,1722.13 1434.76,1672.36 R9.1 1586.64,1672.36 v1(1650,1609)
  Bottom Layer w10: v1(1650,1609) 1650,1511.97 1800,1361.97 1865,1361.97 1871.03,1368 2374.3,1368 U1.6
NetR8_2: R8.2 R10.1 U1.2 | length 1470.5
  Top Layer w10: R8.2 1361.34,1302.13 ; v1(1450,1458) 1415.18,1423.18 1415.18,1355.97 1361.34,1302.13 ; R10.1 1439.24,1342.36 1399,1302.13 1361.34,1302.13
  Bottom Layer w10: v1(1450,1458) 1450,1595 1531,1676 2269.7,1676 U1.2
NetR11_1: R11.1 R15.2 U2.5 | length 2979
  Top Layer w10: R15.2 1180,2607.13 1212,2639.13 1212,2803 1280,2871 1321,2871 1392,2800 1392,2760 1294,2662 1266.46,2662 1266.46,2583.54 1274,2576 1458.83,2576 1470.83,2588 1557,2588 1570,2575 1570,2286 v1(1539,2255) ; v1(1513,2236) 1475,2198 1475,2057.36 1490,2042.36 R11.1
  Bottom Layer w10: v1(1513,2236) 1547,2202 1592,2202 ; v1(1539,2255) 1592,2202 ; U2.5 2543.3,2317 1989,2317 1874,2202 1592,2202
NetR12_1: R12.1 R19.2 U2.7 | length 2076.9
  Top Layer w10: R19.2 1600,2745 1646,2699 v1@1646,2297 ; v1(1645,2298) v1@1646,2297 ; R12.1 1688.64,2037.36 1646,2080 v1@1646,2297
  Bottom Layer w10: v1(1645,2298) 1802,2298 1957,2453 2044,2453 2159.25,2337.75 2364.05,2337.75 U2.7
NetR13_1: R13.1 R16.2 U2.3 | length 1862.1
  Top Layer w10: v1(1081,2110) 1081,2202.13 R16.2 ; R13.1 1772,2297.36 v1(1772,2356)
  Bottom Layer w10: v1(1081,2110) 1041,2150 1041,2380 1062,2401 1400,2401 1445,2356 v1(1772,2356) 1933,2517 2308.7,2517 U2.3
NetR14_1: R14.1 R20.2 U2.1 | length 1566.7
  Top Layer w10: v1(1516,2548) 1516,2450 R20.2 ; R14.1 1842,2597.36 1939.64,2695 U2.1
  Bottom Layer w10: v1(1516,2548) 1634,2666 2308.7,2666 U2.1
NetR17_2: R17.2 R19.1 U2.6 | length 2261.5
  Top Layer w10: R17.2 v1(1431,2622.13) 1432,2622.13 1437.24,2627.36 R19.1
  Bottom Layer w10: v1(1431,2622.13) 1431,2535 1520,2446 1660,2446 1849,2635 2324,2635 2345.95,2613.05 2345.95,2474.95 2312,2441 2292,2441 2271,2420 2271,2380 2293.25,2357.75 2330.33,2357.75 2605.57,2633 2646,2633 2659,2620 2659,2532.7 U2.6
NetR18_2: R18.2 R20.1 U2.2 | length 1354.7
  Top Layer w10: R18.2 1315.25,2202.13 1445.49,2332.36 1480,2332.36 ; v1(1436,2444) 1480,2400 1480,2332.36 ; R20.1 1480,2332.36
  Bottom Layer w10: v1(1436,2444) 1473,2407 1759,2407 1947,2595 U2.2
NetR21_1: R21.1 R25.2 U3.5 | length 3805.8
  Top Layer w10: R25.2 1112,3685 1183,3756 2168,3756 2241,3683 2331,3683 2569,3445 U3.5 ; R21.1 1263.64,2947.36 1211,3000 1211,3339 1314,3442 1512,3442 v1(1554,3484)
  Bottom Layer w10: v1(1554,3484) 2567.3,3484 U3.5
NetR22_1: R22.1 R29.2 U3.7 | length 1356.2
  Top Layer w10: R29.2 1564,3683.82 1680.46,3567.36 R22.1 1736,3567.36 v1(1736,3626)
  Bottom Layer w10: v1(1736,3626) 1924,3814 2345,3814 2496.75,3662.25 2606.3,3662.25 U3.7
NetR23_1: R23.1 R26.2 U3.3 | length 2659.8
  Top Layer w10: R26.2 1140,3245 1167,3272 1167,3710 1193,3736 2102.7,3736 2114.7,3724 ; R23.1 1692.64,3232.36 1665,3260 1665,3414 1780,3529 1780,3680 1824,3724 2114.7,3724 ; U3.3 2114.7,3724
NetR24_1: R24.1 R30.2 U3.1 | length 2066.5
  Top Layer w10: v1(1640,3546) 1640,3506 1585,3451 1585,3371 1577.82,3363.82 R30.2 1275.82,3363.82 1231,3319 1231,3200 1461,3200 1697.64,2963.36 1697.64,2927.36 R24.1
  Bottom Layer w10: v1(1640,3546) 2094.7,3546 U3.1
NetR27_2: R27.2 R29.1 U3.6 | length 1766.9
  Top Layer w10: R27.2 1354,3682.13 1469.94,3566.18 R29.1@1509,3566.18 ; v1(1509,3625) R29.1@1509,3566.18 ; R29.1 R29.1@1509,3566.18
  Bottom Layer w10: v1(1509,3625) 1741,3857 2404,3857 2560,3701 2623,3701 2644,3680 2644,3618.7 2606.3,3581 U3.6
NetR28_2: R28.2 R30.1 U3.2 | length 1948.1
  Top Layer w10: R28.2 1481.1,3240 1487.28,3246.18 R30.1 1560,3246.18 1625,3311.18 v1(1625,3407)
  Bottom Layer w10: v1(1625,3407) 2631,3407 2644,3420 2644,3471 2611,3504 2434.7,3504 U3.2
NetR32_2: R32.2 U4.1 | length 508
  Top Layer w10: R32.2 3363,2995 3388,3020 3388,3045 3434,3091 3434,3420 U4.1
NetR34_2: R34.2 U5.1 | length 981.7
  Top Layer w10: R34.2 3339.88,1842.73 3457.84,1960.68 3457.84,2086.13 3366,2177.96 3366,2360 3394,2388 3480,2388 3501,2367 3501,2246 U5.1
NetR38_2: R38.2 U6.1 | length 451.1
  Top Layer w10: R38.2 3339.88,911.88 3428,1000 3428,1194 3418,1204 3418,1285 U6.1
NetR40_2: R40.2 U7.1 | length 527.4
  Top Layer w10: R40.2 4039.88,3054.88 4099.88,3054.88 4143,3098 4143,3415 U7.1
NetR44_2: R44.2 U9.1 | length 445.3
  Top Layer w10: R44.2 4054.88,1916.88 4138,2000 4138,2207 4113,2232 4113,2270 U9.1
NetR46_2: R46.2 U10.1 | length 471.2
  Top Layer w10: U10.1 4027,1248.5 4027,996 4079.88,943.12 R46.2
NetR49_1: R49.1 R51.2 U11.3 | length 825
  Top Layer w10: R51.2 1782,406.26 1836.8,351.46 R49.1 1933,384.46 1933,542 2066,675 2210,675 2255,720 U11.3
NetR50_1: R50.1 R52.2 U11.1 | length 2036.5
  Top Layer w10: R52.2 1403.74,730 R50.1 1533.74,600 1598.26,600 1639,640.74 1639,736 1605,770 1605,1091.97 1580,1116.97 1485,1116.97 1485,1191 1500,1206 v1(1605,1206)
  Bottom Layer w10: v1(1605,1206) 1891,920 U11.1
NetR52_1: R52.1 U11.2 | length 1289.5
  Top Layer w10: v1(1226,864) 1226,680 R52.1
  Bottom Layer w10: v1(1226,864) 1529,864 1573,820 U11.2
NetR53_1: R53.1 R55.2 U11.7 | length 3277.2
  Top Layer w10: R53.1 1117,710.74 v1(1117,776) ; R55.2 2115,750 2129,764 2412,764 2451,725 2451,320 2500.14,270.86 2619.29,270.86 2619.29,445.71 2552,513 2552,782 U11.7
  Bottom Layer w10: v1(1117,776) 1165,824 1528.5,824 1575.25,777.25 2547.25,777.25 U11.7
NetR54_1: R54.1 R57.2 U11.6 | length 1897.4
  Top Layer w10: R57.2 1045,400 1096.26,348.74 R54.1 v1(1445,518.74)
  Bottom Layer w10: v1(1445,518.74) 1445,680 1496,731 2191.75,731 2240,682.75 2552.75,682.75 U11.6
NetR54_2: R54.2 R55.1 | length 2952.8
  Top Layer w10: R54.2 1157,559.26 1157,800 1115,842 1013,842 971,800 971,151 1040,82 2040,82 2115,157 R55.1
PACK-: J_BATTERY.2 J_LOAD.2 | length 3090
  Top Layer w10: J_BATTERY.2 229,3569 229,2065 325,1969 J_LOAD.2
Shunt: U11.5
pads on no net: J_LEFT.1 J_LEFT.2 J_LEFT.3 J_LEFT.4 J_LEFT.6 J_LEFT.7 J_LEFT.8 J_LEFT.16 J_LEFT.17 J_LEFT.18 J_RIGHT.2 J_RIGHT.3 J_RIGHT.4 J_RIGHT.5 J_RIGHT.6 J_RIGHT.11 J_RIGHT.12 J_RIGHT.13 J_RIGHT.14 J_RIGHT.15 J_RIGHT.16 J_RIGHT.17 J_RIGHT.18 J_RIGHT.19 U12.4 U13.J2_1 U13.J2_2 U13.J2_3 U13.J2_4 U13.J2_5 U13.J2_6 U13.J2_7 U13.J2_8 U13.J2_9 U13.J2_10 U13.J2_11 U13.J2_12 U13.J2_13 U13.J2_14 U13.J2_15 U13.J2_16 U13.J2_17 U13.J2_18 U13.J2_19 U13.J3_1 U13.J3_2 U13.J3_3 U13.J3_4 U13.J3_5 U13.J3_6 U13.J3_7 U13.J3_8 U13.J3_9 U13.J3_10 U13.J3_11 U13.J3_12 U13.J3_13 U13.J3_14 U13.J3_15 U13.J3_16 U13.J3_17 U13.J3_18 U13.J3_19

## Text inside footprints (layer, text, board x,y; h text height)
J_LEFT: Top Overlay "1" at 4675,1318.35 h50 r90; Top Overlay "19" at 4675,3321.14 h50 r90; Mechanical 13 "3.048" at 4655,1277.01 h10 r90; Mechanical 13 "1" at 4675,1318.35 h50 r90; Mechanical 13 "2.540" at 4557.48,1364.02 h10 r90; Mechanical 13 "48.260" at 4765.31,2308.5 h10 r90; Mechanical 13 "45.720" at 4525,2335.98 h10 r90; Mechanical 13 "19" at 4675,3321.14 h50 r90
J_RIGHT: Top Overlay "1" at 5660,1318.35 h50 r90; Top Overlay "19" at 5660,3321.14 h50 r90; Mechanical 13 "3.048" at 5640,1277.01 h10 r90; Mechanical 13 "1" at 5660,1318.35 h50 r90; Mechanical 13 "2.540" at 5542.48,1364.02 h10 r90; Mechanical 13 "48.260" at 5750.31,2308.5 h10 r90; Mechanical 13 "45.720" at 5510,2335.98 h10 r90; Mechanical 13 "19" at 5660,3321.14 h50 r90